# Altium PCB Soft_Latch_11082021.PcbDoc
Units mm, origin at the board's own origin, x right, y up, seen from the top; angles counter-clockwise.
Board outline 27.13 x 17.47 mm, 2 copper layers (Top Layer, Bottom Layer); 25 components, 18 nets, 72 pads, 5 vias.
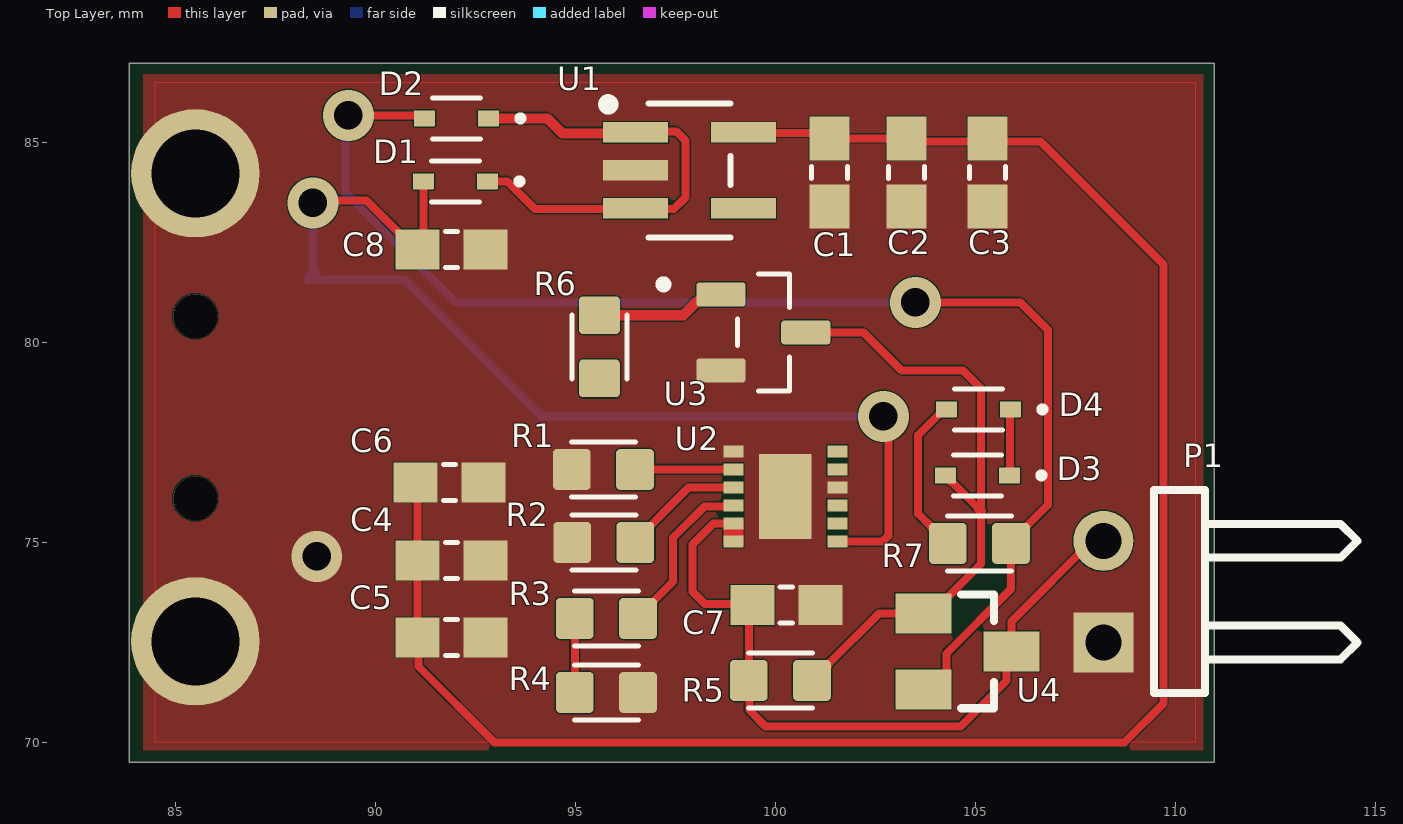
[diagram p0: Top Layer view]
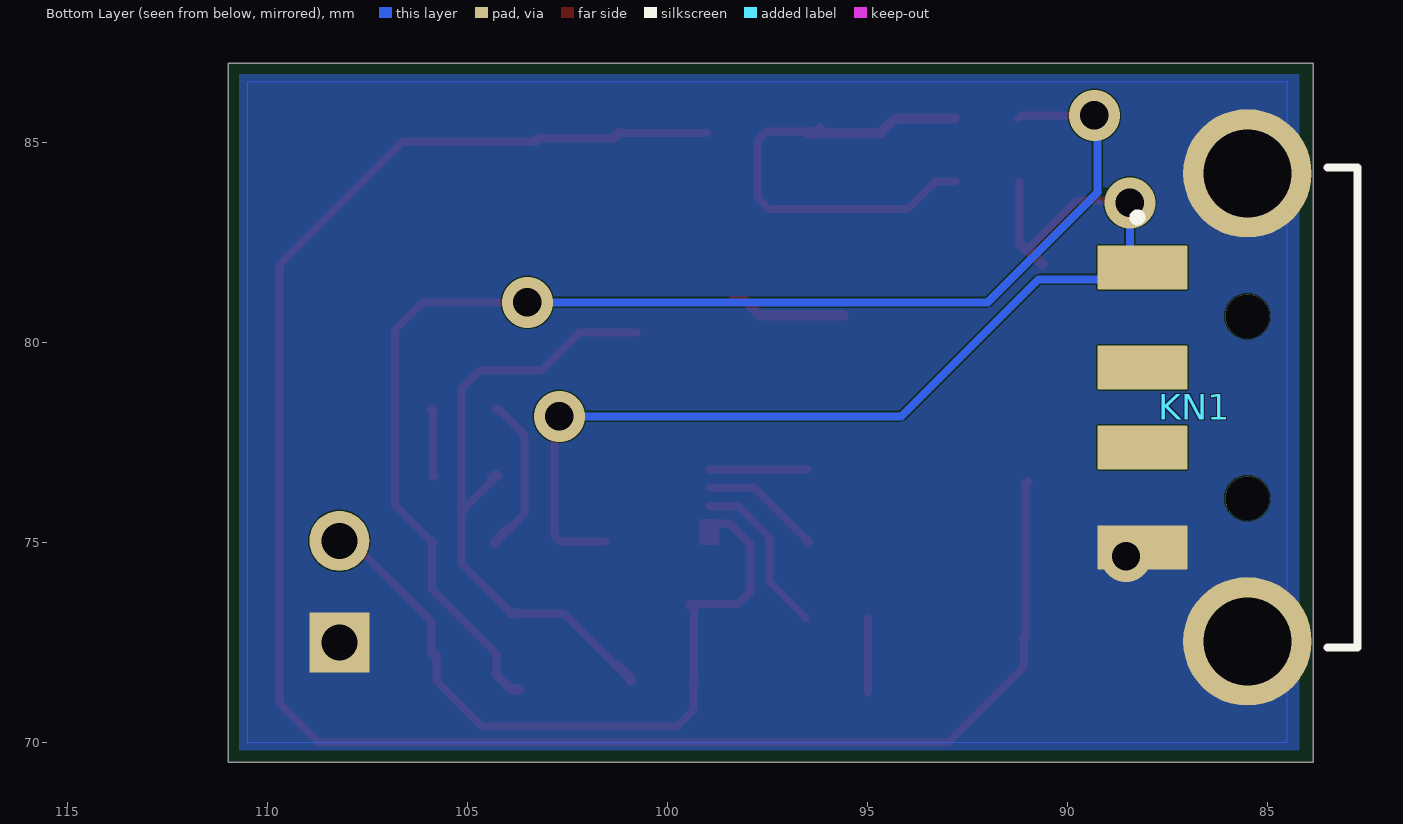
[diagram p1: Bottom Layer view, seen from below]

## Layer stack, top to bottom
Top Solder: solder mask 0.0102, Solder Resist, Dk 3.5
Top Layer: signal copper 0.0356
Dielectric 1: dielectric 0.32, FR-4, Dk 4.8
Bottom Layer: signal copper 0.0356
Bottom Solder: solder mask 0.0102, Solder Resist, Dk 3.5

## Board outline
83.85,69.5 110.975,69.5 110.975,86.975 83.85,86.975

## Design rules (kind name [scope] priority, off if disabled: settings)
Clearance [All] p1: gap=0.02 ignorepadtopadclearanceinfootprint=FALSE
ComponentClearance [All] p1: gap=0.254 collisioncheckmode=3 verticalgap=0 showdistances=FALSE
Height [All] p1: minheight=0 maxheight=5 prefheight=2
MinimumSolderMaskSliver [All] p1: minsoldermaskwidth=0.178
PlaneClearance [All] p1: clearance=0.025
PlaneConnect [All] p1: planeconnectstyle=Direct reliefexpansion=0.508 reliefentries=4 reliefconductorwidth=0.254 reliefairgap=0.254
PolygonConnect [All] p1: connectstyle=Direct reliefconductorwidth=0.254 reliefentries=4 polygonreliefangle="90 Angle" airgapwidth=0.254
RoutingVias [All] p1: holewidth=0.711 width=1.27 viastyle="Through Hole" minholewidth=0.711 minwidth=1.27 maxholewidth=0.711 maxwidth=1.27
SilkToSilkClearance [All] p1: silktosilkclearance=0.2
SilkToSolderMaskClearance [IsPad] p1: minsilkscreentomaskgap=0.178 clearancetoexposedcopper=TRUE
SolderMaskExpansion [All] p1: expansion=0.102 istentingtop=FALSE
Width [All] p1: maxlimit=5 minlimit=0.025 preferedwidth=0.254
23 further rules are at their usual default settings.

## Components (designator, comment, footprint, x,y, rotation, side; value= is the part's Value field where it differs from the comment)
C1 "1000NF 16V" CAP 101.35,84.25 r270 top
C2 "1000NF 16V" CAP 103.275,84.25 r270 top
C3 "1000NF 16V" CAP 105.3,84.25 r270 top
C4 "1000NF 16V" CAP 91.9,74.55 r0 top
C5 "1000NF 16V" CAP 91.9,72.625 r0 top
C6 "06035J6R8BBSTR" CAP 91.85,76.5 r180 top
C7 "4U7F 10V" CAP 100.272,73.433 r180 top
C8 "2U2F 6V3" CAP 91.9,82.325 r0 top
D1 "" DIODE 92,84.025 r180 top
D2 "" DIODE 92.025,85.6 r180 top
D3 "" DIODE 105.05,76.675 r180 top
D4 "" DIODE 105.075,78.325 r180 top
KN1 "USB_TYPE_A" USB_TYPE_A 85.5,78.375 r90 bottom
P1 "Header 2H" HDR1X2H 108.2,72.5 r90 top
R1 "10K %5" RES 95.7,76.825 r180 top
R2 "2K %5" RES 95.71,75 r180 top
R3 "4K7 %5" RES 95.775,73.1 r180 top
R4 "4K7 %5" RES 95.775,71.25 r0 top
R5 "10K %5" RES 100.125,71.55 r0 top
R6 "10K %5" RES 95.6,79.89 r90 top
R7 "10K %5" RES 105.1,74.975 r0 top
U1 "MIC5205-3.3YM5-TR" SOT-23-5_MC_MCH-M 97.854,84.3 r0 top
U2 "STNS01" STNS01 100.25,76.15 r90 top
U3 "" N-MOSFET 99.7,80.25 r0 top
U4 "" P-MOSFET 104.8,72.275 r270 top

## Footprints (in the part's own frame and the unit in brackets; to place one, negate y for a bottom-side part, rotate by r counter-clockwise, add the part's x,y. Pads: shape width x height; smd on the part's side, far side on the other; paste and mask are expansions set on the pad)
CAP [mm]
  rect 1.1x1 smd: 1(-0.85,0) 2(0.85,0)
  silkscreen extent -0.15,-0.45 0.15,0.45, body extent -0.85,-0.45 0.85,0.46, height 0.73
DIODE [mm]
  rrect10% 0.53x0.4 smd: A(0.8,0) C(-0.8,0)
  silkscreen extent -1.65,-0.52 0.6,0.52, body extent -0.85,-0.45 0.85,0.45, height 0.82
HDR1X2H [mm] "Connector; Header; 2 Position; Right Angle"
  rect 1.5x1.5 hole 0.9: 1(0,0)
  round 1.5 hole 0.9: 2(2.54,0)
  silkscreen extent -1.27,-6.35 3.81,-1.27
N-MOSFET [mm]
  rrect25% 1.23x0.6 smd: 1(-1.06,0.95) 2(-1.06,-0.95) 3(1.06,0)
  silkscreen extent -2.6,-1.46 0.65,1.46, body extent -1.05,-1 1.05,1, height 1
P-MOSFET [mm]
  rect 1x1.4 smd: 1(-0.95,-1.1) 2(0.95,-1.1) 3(0,1.1)
  silkscreen extent -1.42,-0.15 1.42,0.66, body extent -1,-1.05 1,1.05, height 1.1
RES [mm]
  rrect20% 0.94x1.02 smd: 1(-0.79,0) 2(0.79,0)
  silkscreen extent -0.8,-0.69 0.8,0.69, body extent -0.8,-0.4 0.8,0.4, height 0.71
SOT-23-5_MC_MCH-M [mil]
  rect 64x20 smd paste+0 mask+0: 1(-53,37.4) 2(-53,0) 3(-53,-37.4) 4(53,-37.4) 5(53,37.4)
  silkscreen extent -85,-66 40,70, body extent -63,-61 63,61, height 67
STNS01 [mm]
  rect 0.3x0.5 smd: 1(-1.125,-1.3) 2(-0.675,-1.3) 3(-0.225,-1.3) 4(0.225,-1.3) 5(0.675,-1.3) 6(1.125,-1.3) 7(1.125,1.3) 8(0.675,1.3) 9(0.225,1.3) 10(-0.225,1.3) 11(-0.675,1.3) 12(-1.125,1.3)
  rect 2.12x1.31 smd: 13(0,0)
  body extent -1.57,-1.57 1.58,1.57, height 0.81
USB_TYPE_A [mm]
  rrect4% 1.1x2.25 smd: 1(3.5,2.625) 2(1,2.625) 3(-1,2.625) 4(-3.5,2.625)
  round 3.216 hole 2.2: 5(-5.85,0) 8(5.85,0)
  round 1.1 hole 1.1 unplated: ""(-2.275,0) ""(2.275,0)
  silkscreen extent -6,-2.75 6,2.85, body extent -6.29,-17.61 6.2,3.67, height 3.07

## Part data
C1 C2 C3 C4 C5 C7 C8: library part 06035J6R8BBSTR, "RF/Microwave Capacitor; Capacitance:6.8pF; Capacitance Tolerance:Â± 0.1pF; Series:Accu-P; Voltage Rating:50VDC; Capacitor Dielectric Type:Thin Film; Package/Case:0603; Termination Type:SMD; Leaded Process Compatible:Yes ;RoHS Compliant: Yes", Package=None, Availability=Unavailable, MP=06035J6R8BBSTR, Price=None
C6: "RF/Microwave Capacitor; Capacitance:6.8pF; Capacitance Tolerance:Â± 0.1pF; Series:Accu-P; Voltage Rating:50VDC; Capacitor Dielectric Type:Thin Film; Package/Case:0603; Termination Type:SMD; Leaded Process Compatible:Yes ;RoHS Compliant: Yes", Package=None, Availability=Unavailable, MP=06035J6R8BBSTR, Price=None
D1 D2 D3 D4: library part 1N4148WT, "Diode Standard 100V 150mA Surface Mount SOD-123", Package="SOD-123 Multicomp", Availability=Unavailable, MF="Micro Commercial", MP=1N4148W+, Price=None, SnapEDA_Link=https://www.snapeda.com/parts/1N4148W%2B/Micro%20Commercial/view-part/2755184/?ref=snap
KN1: "Conn USB 2.0 Type A PL 4 POS Solder RA SMD 4 Terminal 1 Port Tray", Manufacturer=Molex, Manufacturer Part Number=0480371000, Max Operating Temperature=85°C, Max Voltage Rating (AC)=150V, Min Operating Temperature=-20°C, Package Quantity=1000, Supplier Part Number 1=WM17118-ND, Category=Connectors, ComponentLink1Description=https://datasheet.ciiva.com/15181/getdatasheetpartid-168028-15181217.pdf?src-supplier=Verical, ComponentLink1URL=https://datasheet.ciiva.com/15181/getdatasheetpartid-168028-15181217.pdf?src-supplier=Verical, ComponentLink2Description=https://datasheet.ciiva.com/851/480371000-sd-851331.pdf?src-supplier=Digi-Key, ComponentLink2URL=https://datasheet.ciiva.com/851/480371000-sd-851331.pdf?src-supplier=Digi-Key, ComponentLink3Description=https://datasheet.ciiva.com/3897/88000480371000-io-nectors-3897640.pdf?src-supplier=Arrow+Electronics, ComponentLink3URL=https://datasheet.ciiva.com/3897/88000480371000-io-nectors-3897640.pdf?src-supplier=Arrow+Electronics, Connector Type=USB, Contact Material=Brass, Contact Plating=Gold, Depth=18.8mm, Features=Shielded, Housing Material=Thermoplastic, Length=12.7mm, Mount="Surface Mount,Horizontal", Number of Contacts=4, Number of Ports=1, Number of Terminals/Pins=4, Orientation="Right Angle", Packaging=Tray, Pricing 1="1=1,33000, 10=1,09800, 230=0,91526, 1000=0,73221, 3000=0,66356 (USD)", RoHS=Yes, RoHS Compliant=Yes, Series=-, Stock 1=23319, Supplier 1=Digi-Key, Termination=Solder
P1: "Header, 2-Pin, Right Angle", LatestRevisionDate=17-Jul-2002, LatestRevisionNote="Re-released for DXP Platform.", Publisher="Altium Limited"
R1 R2 R3 R4 R5 R6 R7: library part 8-1676481-3, "RES SMD 22K OHM 0.1% 1/16W 0603", Package=0603, Power_Rating=".063 W", Resistance=22K, Tolerance=.1%, Voltage_Rating="50 V", Availability=Warning, EU_RoHS_Compliance=Compliant, MF="TE Connectivity", MP=8-1676481-3, Price=None, SnapEDA_Link=https://www.snapeda.com/parts/8-1676481-3/TE%20Connectivity/view-part/2208246/?ref=snap
U1: "No Description Available", Mfr_Name=Microchip, Copyright="Copyright (C) 2021 Ultra Librarian. All rights reserved.", Manufacturer_Part_Number=MIC5205-3.3YM5-TR, RefDes=RefDes, Type=DEV
U2: "IC LI-ION BATT CHARGER LDO 12DFN", Case/Package=DFN, Manufacturer=STMicroelectronics, Manufacturer Part Number=STNS01PUR, Max Charge Current=400mA, Max Operating Temperature=85°C, Max Output Current=200mA, Max Output Voltage=3.193V, Max Supply Voltage=5.4V, Min Operating Temperature=-40°C, Min Output Voltage=3.007V, Min Supply Voltage=4.55V, Operating Supply Current=1.4mA, Output Voltage=3.1V, Package Quantity=3000, Supplier Part Number 1=8291431P, Category="Battery Management", ComponentLink1Description="New link", ComponentLink2Description=https://datasheet.ciiva.com/18617/dm00085223-18617622.pdf?src-supplier=Digi-Key, ComponentLink2URL=https://datasheet.ciiva.com/18617/dm00085223-18617622.pdf?src-supplier=Digi-Key, ComponentLink3Description=https://datasheet.ciiva.com/24021/dm00085223-24021750.pdf?src-supplier=Mouser, ComponentLink3URL=https://datasheet.ciiva.com/24021/dm00085223-24021750.pdf?src-supplier=Mouser, ComponentLink4Description=https://datasheet.ciiva.com/41458/001184952-da-01-en-ic-li-ion-batt-char-stns01pur-dfn-12-stm-41458066.pdf?src-supplier=Conrad, ComponentLink4URL=https://datasheet.ciiva.com/41458/001184952-da-01-en-ic-li-ion-batt-char-stns01pur-dfn-12-stm-41458066.pdf?src-supplier=Conrad, ComponentLink5Description=https://datasheet.ciiva.com/18617/dm00085223-18617623.pdf?src-supplier=Digi-Key, ComponentLink5URL=https://datasheet.ciiva.com/18617/dm00085223-18617623.pdf?src-supplier=Digi-Key, ComponentLink6Description=https://datasheet.ciiva.com/18617/dm00085223-18617624.pdf?src-supplier=Digi-Key, ComponentLink6URL=https://datasheet.ciiva.com/18617/dm00085223-18617624.pdf?src-supplier=Digi-Key, Contact Plating=Tin,Matte, Height=0.75mm, Lead Free="Lead Free", Length=3.15mm, Mount="Surface Mount", Number of Cells=1, Number of Pins=12, Output Current=200mA, Packaging="Tape and Reel", Pricing 1="5=2,20000, 10=1,87200, 100=1,30300, 500=1,26400 (USD)", Radiation Hardening=No, REACH SVHC="No SVHC", RoHS=Yes, RoHS Compliant=Yes, Stock 1=1, Supplier 1=RSComponents, Width=3.15mm
U3: library part 2N7002, "N-Channel 60V 280mA (Ta) 350mW (Ta) Surface Mount SOT-23-3 (TO-236)", Package="SOT-23 Multicomp", Availability="In Stock", Check_prices=https://www.snapeda.com/parts/2N7002/ON%20Semiconductor/view-part/4449003/?ref=eda, MF="ON Semiconductor", MP=2N7002, Price=None, Purchase-URL=https://pricing.snapeda.com/search/part/2N7002/?ref=eda, SnapEDA_Link=https://www.snapeda.com/parts/2N7002/ON%20Semiconductor/view-part/4449003/?ref=snap
U4: library part FDN352AP, "P-Channel 30V 1.3A _Ta_ 500mW _Ta_ Surface Mount SuperSOT-3", Package="SC-59 ON Semiconductor", Availability=Unavailable, MF="ON Semiconductor", MP=FDN352AP, Price=None, SnapEDA_Link=https://www.snapeda.com/parts/FDN352AP/ON%20Semiconductor/view-part/1400764/?ref=snap

## Via types
v1: diameter 1.27, hole 0.711, Top Layer to Bottom Layer, 5 vias

## Nets (pads, with @x,y where several pads share a name; then routed paths per layer and width w, separated by ;. In a path a pad name is that pad's centre, name@x,y a point inside that pad or via, vN(x,y) a via of type N, cw(c..) or ccw(c..) an arc to the next point about the centre after c; other vN are vias at no path point)
"+3V3 LDO": C1.1 C2.1 C3.1 C4.1 C5.1 C6.2 U1.5 | length 47.5
  Top Layer w0.2: C5.1 C4.1 C6.2@91.05,76.45 ; C5.1@91.082,72.593 91.082,71.893 92.978,69.997 108.722,69.997 109.7,70.975 109.7,81.95 106.625,85.025 105.3,85.025 C2.1@103.3,85.025 ; U1.5@99.005,85.235 C1.1@101.215,85.235 ; C1.1 C2.1@103.225,85.1
  Top Layer w0.254: C6.2 C6.2@91.05,76.45 ; C5.1 C5.1@91.082,72.593 ; C1.1@101.215,85.235 C1.1 ; C2.1@103.225,85.1 103.275,85.05 C2.1@103.3,85.025
"+5V USB": C8.1 D1.A KN1.1 U2.1 | length 27.6
  Top Layer w0.2: v1(88.438,83.488) 88.5,83.55 89.775,83.55 C8.1@91,82.325 ; C8.1@91.2,82.475 D1.A ; U2.1 102.676,75.025 102.825,75.174 v1@102.825,78.025
  Top Layer w0.254: C8.1@90.627,81.952 91,82.325 C8.1 C8.1@91.2,82.475 ; v1(102.7,78.15) v1@102.825,78.025
  Bottom Layer w0.2: KN1.1@88.325,81.575 90.728,81.575 94.153,78.15 v1(102.7,78.15) ; v1(88.438,83.488) 88.438,81.812 KN1.1@88.5,81.75
  Bottom Layer w0.254: KN1.1@88.325,81.575 KN1.1@88.5,81.75
"BAT CHG": U2.5
BAT+: C7.2 P1.2 R5.1 U2.11 U2.12 U4.3 | length 18.3
  Top Layer w0.2: U2.11 98.45,75.475 97.925,74.95 97.925,73.775 98.242,73.458 99.335,73.458 99.397,73.458 C7.2 ; R5.1 C7.2@99.335,73.347 ; R5.1@99.347,71.538 99.347,70.808 99.754,70.4 104.633,70.4 105.775,71.543 U4.3@105.775,72.15 ; U4.3 105.9,73.025 P1.2@107.965,75.09
  Top Layer w0.254: R5.1 R5.1@99.347,71.538 ; C7.2@99.335,73.347 C7.2 ; U4.3@105.775,72.15 U4.3 ; P1.2@107.965,75.09 P1.2@108.05,75.09
"DATA (+)": KN1.3
DATA(-): KN1.2
GND: C1.2 C2.2 C3.2 C4.2 C5.2 C6.1 C7.1 C8.2 KN1.4 KN1.5 KN1.8 P1.1 R1.2 R2.2 R4.2 U1.2 U2.4 U2.7 U2.13 U3.2
  other v1: 88.535,74.649
"GPIO OFF": R6.1
"GPIO ST": D3.C D4.C | length 1.7
  Top Layer w0.2: D3.C@105.863,76.687 D4.C@105.863,78.312
  Top Layer w0.254: D3.C D3.C@105.863,76.687 ; D4.C@105.863,78.312 D4.C
NetD2_A: D2.A R7.2 U4.2 | length 33.3
  Top Layer w0.2: v1(89.325,85.675) 91.15,85.675 D2.A ; v1(103.5,81) 106.125,81 106.815,80.31 106.815,75.94 R7.2@105.89,75.015 ; U4.2@104.273,71.698 104.273,72.215 105.89,73.832 R7.2
  Top Layer w0.254: U4.2 103.9,71.325 U4.2@104.273,71.698 ; R7.2 R7.2@105.89,75.015
  Bottom Layer w0.2: v1(89.325,85.675) 89.25,85.6 89.25,83.75 92,81 v1(103.5,81)
NetD3_A: D3.A R5.2 U3.3 U4.1 | length 16.1
  Top Layer w0.2: U3.3 102.2,80.25 103.149,79.301 104.691,79.301 105.143,78.85 105.143,75.782 105.143,74.468 U4.1@103.9,73.225 ; R5.2@101.298,71.933 102.59,73.225 U4.1 ; D3.A@104.388,76.537 105.094,75.831
  Top Layer w0.254: R5.2 100.915,71.59 101.258,71.933 R5.2@101.298,71.933 ; U4.1 U4.1@103.9,73.225 ; D3.A 104.315,76.675 104.388,76.602 D3.A@104.388,76.537 ; 105.094,75.831 105.143,75.782
NetD4_A: D4.A R7.1 | length 4
  Top Layer w0.2: R7.1@103.927,75.358 103.571,75.714 103.571,77.686 D4.A@104.21,78.325
  Top Layer w0.254: R7.1@103.927,75.358 103.967,75.358 104.31,75.015 R7.1 ; D4.A@104.21,78.325 D4.A
NetR1_1: R1.1 U2.8 | length 2.5
  Top Layer w0.2: R1.1 U2.8
NetR2_1: R2.1 U2.9 | length 3
  Top Layer w0.2: R2.1@96.5,75.04 97.83,76.37 U2.9@98.945,76.37
  Top Layer w0.254: R2.1 R2.1@96.5,75.04
NetR3_1: R3.1 U2.10 | length 4.2
  Top Layer w0.2: R3.1 96.565,73.14 97.443,74.018 97.443,75.118 98.224,75.899 98.924,75.899 U2.10
NetR6_2: R6.2 U3.1 | length 2.9
  Top Layer w0.254: R6.2 97.697,80.68 98.055,81.039 U3.1@98.37,81.039
"PWR LINE": D1.C D2.C U1.1 U1.3 | length 12.4
  Top Layer w0.2: D1.C 93.3,84.025 93.99,83.335 97.46,83.335 97.75,83.625 97.75,85.05 97.525,85.275 U1.1@96.353,85.275
  Top Layer w0.254: D2.C 94.3,85.6 94.675,85.225 96.483,85.225 U1.1 ; U1.1@96.186,85.362 96.313,85.235 U1.1@96.353,85.275
VBMS: R3.2 R4.1 | length 1.9
  Top Layer w0.2: R4.1 R3.2
pads on no net: KN1. U1.4 U2.2 U2.3 U2.6

## Polygon pours and split planes (outlines as drawn)
GND on Bottom Layer "GND_L02_P004" (solid, pour order 4): 110.7,86.7 110.7,69.8 84.2,69.8 84.2,86.7
no net on Bottom Layer "NONET_L02_P001" (solid, shelved, pour order 1): 84.5,86.5 110.5,86.5 110.5,70 84.5,70
GND on Top Layer "GND_L01_P002" (solid, pour order 2): 84.2,69.8 110.7,69.8 110.7,86.7 84.2,86.7
GND on Top Layer "NONET_L01_P000" (solid, shelved, pour order 0): 84.5,86.5 110.5,86.5 110.5,70 84.5,70

## Other copper
Top Layer:
  rectangle net BAT+: 98.7,74.941 99.2,75.589
  rectangle net BAT+: 98.949,75.025 98.95,75.459

## Silkscreen, mask and mechanical layers (free items; w line width, h text height)
Mechanical 1:
  lines w0.254: 83.85,86.975 110.975,86.975 110.975,69.5 83.85,69.5 83.85,87

## Text inside footprints (layer, text, board x,y; h text height)
KN1: Mechanical 13 "PCB EDGE" at 83,74.875 h1.02 r270